# Altium PCB Chip Reader PCB.PcbDoc (part 1 of 2)
Units mm, origin at the board's own origin, x right, y up, seen from the top; angles counter-clockwise.
Board outline 155.1 x 69 mm, 2 copper layers (Top Layer, Bottom Layer), stack 1.6 mm thick; 129 components, 123 nets, 435 pads, 207 vias.
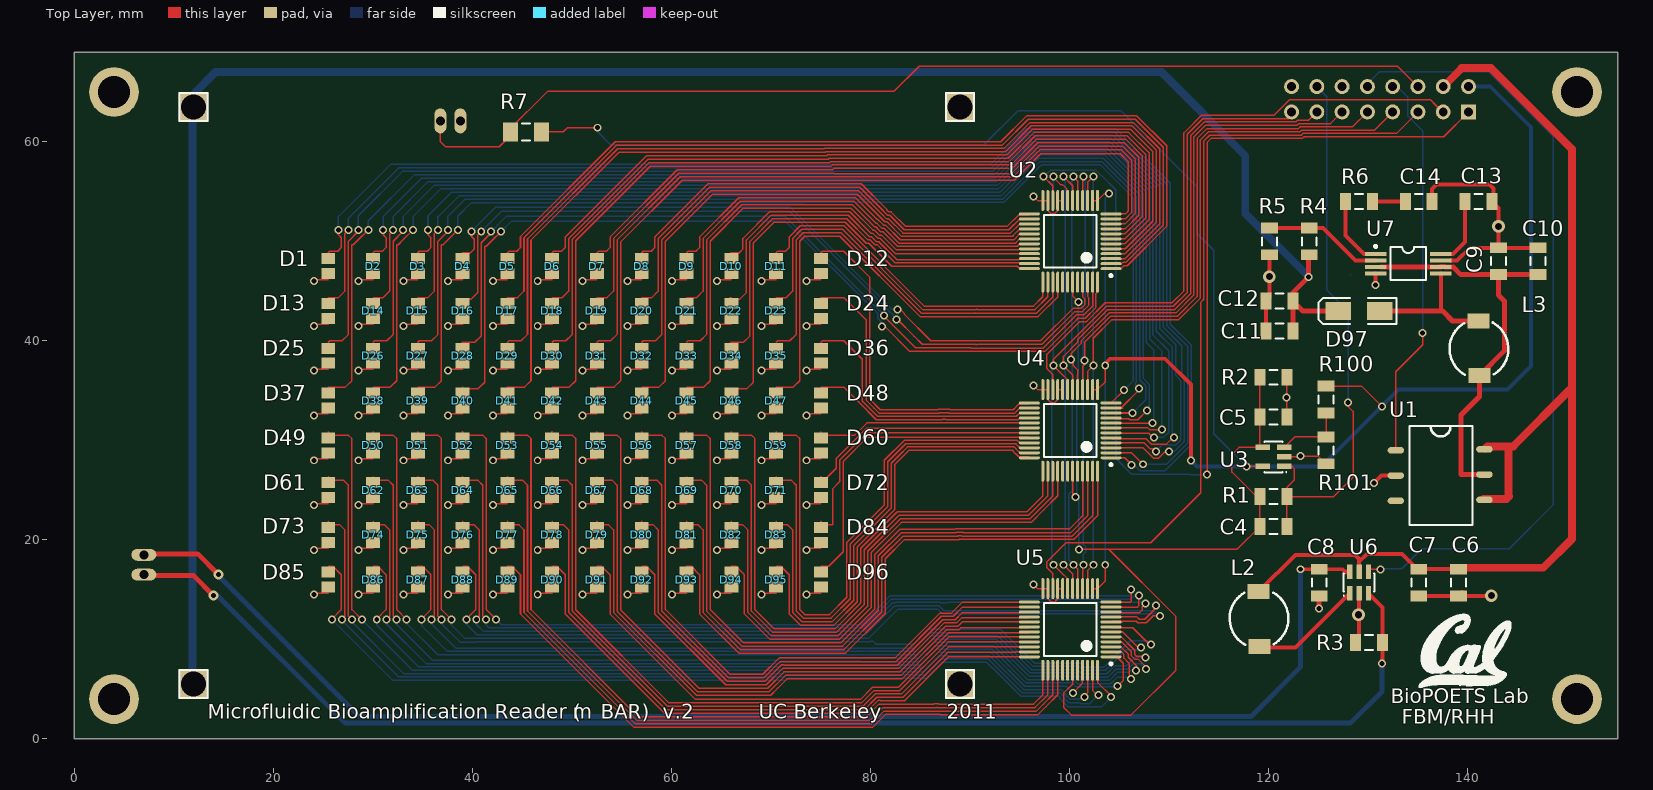
[diagram p0: Top Layer view]
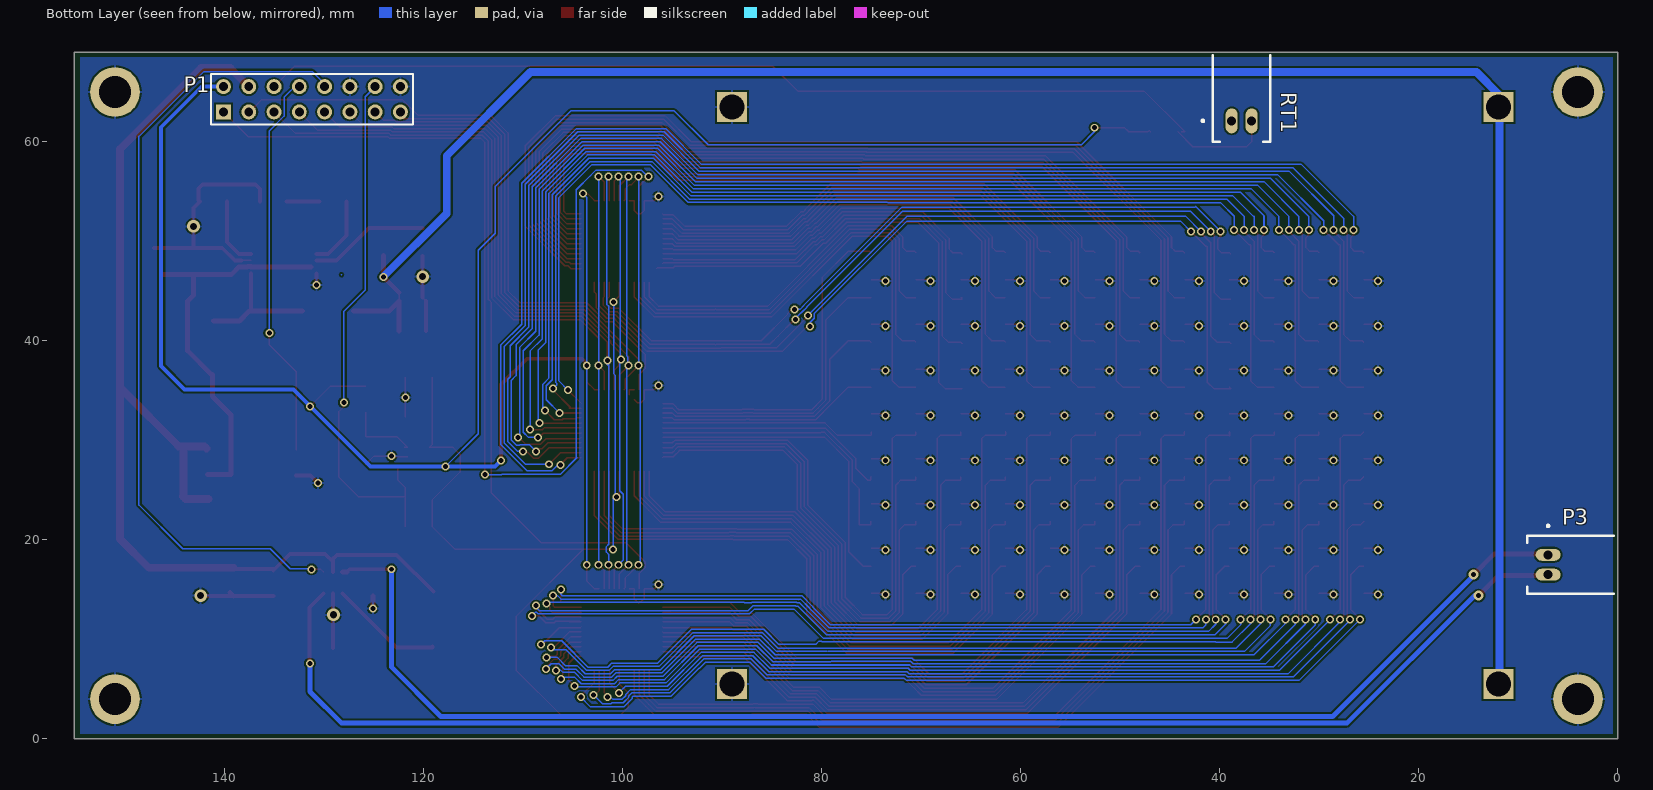
[diagram p1: Bottom Layer view, seen from below]

## Layer stack, top to bottom
Top Layer: signal copper 0.1
Dielectric: core 1.4, FR-4, Dk 4.8
Bottom Layer: signal copper 0.1

## Board outline
0,69 155.1,69 155.1,0 0,0

## Design rules (kind name [scope] priority, off if disabled: settings)
Clearance [All] p1: gap=0.18
FabricationTestpoint [(IsPad And (OnTopLayer Or OnBottomLayer))] p1: side=3 testpointundercomponent=TRUE minsize=1.016 maxsize=2.54 preferedsize=1.524 minholesize=0 maxholesize=1.016 preferedholesize=0.813 testpointgrid=0.025 allowsidetop=TRUE allowsidebottom=TRUE usegrid=TRUE gridtolerance=0
HoleSize [All] p1: absolutevalues=TRUE maxlimit=5 minlimit=0.025 maxpercent=80.000 minpercent=20.000
MinimumSolderMaskSliver [All] p1 off: minsoldermaskwidth=0.05
PolygonConnect [All] p1: connectstyle=Relief reliefconductorwidth=0.254 reliefentries=4 polygonreliefangle="90 Angle"
RoomDefinition "LED Driver" [InComponentClass('LED Driver')] p1 off: confinementstyle=ConfineIn formatcopy=TRUE lockcomponents=FALSE outline 114.744,5.7 143.09,5.7 143.09,17.94 114.744,17.94
RoomDefinition "Heater Driver" [InComponentClass('Heater Driver')] p2 off: confinementstyle=ConfineIn formatcopy=TRUE lockcomponents=FALSE outline 114.3,38.384 151.1,38.384 151.1,59 114.3,59
RoutingVias [All] p1: holewidth=0.5 width=0.8 viastyle="Through Hole" minholewidth=0.5 minwidth=0.8 maxholewidth=0.5 maxwidth=0.8
SilkscreenOverComponentPads [All] p1: minsilkscreentomaskgap=0.05
SolderMaskExpansion [All] p1: expansion=0.102
Width BATT+ [InNet('BATT+')] p1: maxlimit=0.9 minlimit=0.4 preferedwidth=0.5 minimp=50.000000 maximp=50.000000 favimp=50.000000
Width Default [All] p2: maxlimit=0.8 minlimit=0.152 preferedwidth=0.152 minimp=50.000000 maximp=50.000000 favimp=50.000000
24 further rules are at their usual default settings.

## Classes and differential pairs
component class "Heater Driver": C9 C10 C11 C12 C13 C14 D97 L3 R4 R5 R6 R7 RT1 U1 U7
component class "LED Driver": C6 C7 C8 L2 P3 R3 U6
component class Photodiodes: C4 C5 D1 D2 D3 D4 D5 D6 D7 D8 D9 D10 D11 D12 D13 D14 D15 D16 D17 D18 D19 D20 D21 D22 D23 D24 D25 D26 D27 D28 D29 D30 D31 D32 D33 D34 D35 D36 D37 D38 D39 D40 D41 D42 D43 D44 D45 D46 D47 D48 D49 D50 D51 D52 D53 D54 D55 D56 D57 D58 D59 D60 D61 D62 D63 D64 D65 D66 D67 D68 D69 D70 D71 D72 D73 D74 D75 D76 D77 D78 D79 D80 D81 D82 D83 D84 D85 D86 D87 D88 D89 D90 D91 D92 D93 D94 D95 D96 P1 R1 R2 R100 R101 U2 U3 U4 U5

## Components (designator, comment, footprint, x,y, rotation, side; value= is the part's Value field where it differs from the comment)
C4 "Cap Semi" CAPC3216L 120.49,21.34 r0 top
C5 "Cap Semi" CAPC3216L 120.49,32.34 r180 top
C6 "Cap" CAPC3216L 139.1,15.7 r90 top
C7 "Cap Semi" CAPC3216L 135.1,15.7 r90 top
C8 "Cap Semi" CAPC3216L 125.1,15.7 r90 top
C9 "Cap Semi" CAPC3216L 143.1,48 r270 top
C10 "Cap Semi" CAPC3216L 147.1,48 r270 top
C11 "Cap Semi" CAPC3216L 121.1,41 r0 top
C12 "Cap Semi" CAPC3216L 121.1,44 r0 top
C13 "Cap Semi" CAPC3216L 141.1,54 r180 top
C14 "Cap Semi" CAPC3216L 135.1,54 r180 top
D1 "Photo Sen" CAPC2012L 25.526,47.5 r90 top
D2 "Photo Sen" CAPC2012L 30.026,47.5 r90 top
D3 "Photo Sen" CAPC2012L 34.526,47.5 r90 top
D4 "Photo Sen" CAPC2012L 39.026,47.5 r90 top
D5 "Photo Sen" CAPC2012L 43.526,47.5 r90 top
D6 "Photo Sen" CAPC2012L 48.026,47.5 r90 top
D7 "Photo Sen" CAPC2012L 52.526,47.5 r90 top
D8 "Photo Sen" CAPC2012L 57.026,47.5 r90 top
D9 "Photo Sen" CAPC2012L 61.526,47.5 r90 top
D10 "Photo Sen" CAPC2012L 66.026,47.5 r90 top
D11 "Photo Sen" CAPC2012L 70.526,47.5 r90 top
D12 "Photo Sen" CAPC2012L 75.026,47.5 r90 top
D13 "Photo Sen" CAPC2012L 25.526,43 r90 top
D14 "Photo Sen" CAPC2012L 30.026,43 r90 top
D15 "Photo Sen" CAPC2012L 34.526,43 r90 top
D16 "Photo Sen" CAPC2012L 39.026,43 r90 top
D17 "Photo Sen" CAPC2012L 43.526,43 r90 top
D18 "Photo Sen" CAPC2012L 48.026,43 r90 top
D19 "Photo Sen" CAPC2012L 52.526,43 r90 top
D20 "Photo Sen" CAPC2012L 57.026,43 r90 top
D21 "Photo Sen" CAPC2012L 61.526,43 r90 top
D22 "Photo Sen" CAPC2012L 66.026,43 r90 top
D23 "Photo Sen" CAPC2012L 70.526,43 r90 top
D24 "Photo Sen" CAPC2012L 75.026,43 r90 top
D25 "Photo Sen" CAPC2012L 25.526,38.5 r90 top
D26 "Photo Sen" CAPC2012L 30.026,38.5 r90 top
D27 "Photo Sen" CAPC2012L 34.526,38.5 r90 top
D28 "Photo Sen" CAPC2012L 39.026,38.5 r90 top
D29 "Photo Sen" CAPC2012L 43.526,38.5 r90 top
D30 "Photo Sen" CAPC2012L 48.026,38.5 r90 top
D31 "Photo Sen" CAPC2012L 52.526,38.5 r90 top
D32 "Photo Sen" CAPC2012L 57.026,38.5 r90 top
D33 "Photo Sen" CAPC2012L 61.526,38.5 r90 top
D34 "Photo Sen" CAPC2012L 66.026,38.5 r90 top
D35 "Photo Sen" CAPC2012L 70.526,38.5 r90 top
D36 "Photo Sen" CAPC2012L 75.026,38.5 r90 top
D37 "Photo Sen" CAPC2012L 25.526,34 r90 top
D38 "Photo Sen" CAPC2012L 30.026,34 r90 top
D39 "Photo Sen" CAPC2012L 34.526,34 r90 top
D40 "Photo Sen" CAPC2012L 39.026,34 r90 top
D41 "Photo Sen" CAPC2012L 43.526,34 r90 top
D42 "Photo Sen" CAPC2012L 48.026,34 r90 top
D43 "Photo Sen" CAPC2012L 52.526,34 r90 top
D44 "Photo Sen" CAPC2012L 57.026,34 r90 top
D45 "Photo Sen" CAPC2012L 61.526,34 r90 top
D46 "Photo Sen" CAPC2012L 66.026,34 r90 top
D47 "Photo Sen" CAPC2012L 70.526,34 r90 top
D48 "Photo Sen" CAPC2012L 75.026,34 r90 top
D49 "Photo Sen" CAPC2012L 25.526,29.5 r90 top
D50 "Photo Sen" CAPC2012L 30.026,29.5 r90 top
D51 "Photo Sen" CAPC2012L 34.526,29.5 r90 top
D52 "Photo Sen" CAPC2012L 39.026,29.5 r90 top
D53 "Photo Sen" CAPC2012L 43.526,29.5 r90 top
D54 "Photo Sen" CAPC2012L 48.026,29.5 r90 top
D55 "Photo Sen" CAPC2012L 52.526,29.5 r90 top
D56 "Photo Sen" CAPC2012L 57.026,29.5 r90 top
D57 "Photo Sen" CAPC2012L 61.526,29.5 r90 top
D58 "Photo Sen" CAPC2012L 66.026,29.5 r90 top
D59 "Photo Sen" CAPC2012L 70.526,29.5 r90 top
D60 "Photo Sen" CAPC2012L 75.026,29.5 r90 top
D61 "Photo Sen" CAPC2012L 25.526,25 r90 top
D62 "Photo Sen" CAPC2012L 30.026,25 r90 top
D63 "Photo Sen" CAPC2012L 34.526,25 r90 top
D64 "Photo Sen" CAPC2012L 39.026,25 r90 top
D65 "Photo Sen" CAPC2012L 43.526,25 r90 top
D66 "Photo Sen" CAPC2012L 48.026,25 r90 top
D67 "Photo Sen" CAPC2012L 52.526,25 r90 top
D68 "Photo Sen" CAPC2012L 57.026,25 r90 top
D69 "Photo Sen" CAPC2012L 61.526,25 r90 top
D70 "Photo Sen" CAPC2012L 66.026,25 r90 top
D71 "Photo Sen" CAPC2012L 70.526,25 r90 top
D72 "Photo Sen" CAPC2012L 75.026,25 r90 top
D73 "Photo Sen" CAPC2012L 25.526,20.5 r90 top
D74 "Photo Sen" CAPC2012L 30.026,20.5 r90 top
D75 "Photo Sen" CAPC2012L 34.526,20.5 r90 top
D76 "Photo Sen" CAPC2012L 39.026,20.5 r90 top
D77 "Photo Sen" CAPC2012L 43.526,20.5 r90 top
D78 "Photo Sen" CAPC2012L 48.026,20.5 r90 top
D79 "Photo Sen" CAPC2012L 52.526,20.5 r90 top
D80 "Photo Sen" CAPC2012L 57.026,20.5 r90 top
D81 "Photo Sen" CAPC2012L 61.526,20.5 r90 top
D82 "Photo Sen" CAPC2012L 66.026,20.5 r90 top
D83 "Photo Sen" CAPC2012L 70.526,20.5 r90 top
D84 "Photo Sen" CAPC2012L 75.026,20.5 r90 top
D85 "Photo Sen" CAPC2012L 25.526,16 r90 top
D86 "Photo Sen" CAPC2012L 30.026,16 r90 top
D87 "Photo Sen" CAPC2012L 34.526,16 r90 top
D88 "Photo Sen" CAPC2012L 39.026,16 r90 top
D89 "Photo Sen" CAPC2012L 43.526,16 r90 top
D90 "Photo Sen" CAPC2012L 48.026,16 r90 top
D91 "Photo Sen" CAPC2012L 52.526,16 r90 top
D92 "Photo Sen" CAPC2012L 57.026,16 r90 top
D93 "Photo Sen" CAPC2012L 61.526,16 r90 top
D94 "Photo Sen" CAPC2012L 66.026,16 r90 top
D95 "Photo Sen" CAPC2012L 70.526,16 r90 top
D96 "Photo Sen" CAPC2012L 75.026,16 r90 top
D97 "CDBA120SL-G" DSO-C2/G1.6 129.1,43 r180 top
L2 "Inductor" "MURATA SMT INDUCTOR" 119.1,9.3 r0 top
L3 "Inductor" "MURATA SMT INDUCTOR" 141.1,42 r180 top
P1 "Header 8X2A" HDR2X8_CEN 140.1,63 r180 bottom
P3 "LED" "2MM JST PH - 2 PIN" 7,17.5 r180 bottom
R1 "Res3" RESC3216L 120.49,24.34 r180 top
R2 "Res3" RESC3216L 120.49,36.34 r180 top
R3 "Res3" RESC3216L 130.1,9.7 r0 top
R4 "Res3" RESC3216L 124.1,50 r270 top
R5 "Res3" RESC3216L 120.1,50 r90 top
R6 "Res3" RESC3216L 129.1,54 r180 top
R7 "Res3" RESC3216M 45.4,61 r0 top
R100 "Res3" RESC3216L 125.8,34.1 r90 top
R101 "Res3" RESC3216L 125.8,29 r90 top
RT1 "Res Thermal" "2MM JST PH - 2 PIN" 37.8,62.1 r90 bottom
U1 "CLA324 Relay" 6-SMD 132.8,29 r0 top
U2 "ADG732" ST-48_M 100.076,50 r180 top
U3 "AD8603" RJ-5 120.49,28.34 r90 top
U4 "ADG732" ST-48_M 100.076,31 r180 top
U5 "ADG732" ST-48_M 100.076,11 r180 top
U6 "MIC3289" SOT-23_A 129.1,15.7 r0 top
U7 "TPS61085" DB008 134.04,47.76 r270 top

## Footprints (in the part's own frame and the unit in brackets; to place one, negate y for a bottom-side part, rotate by r counter-clockwise, add the part's x,y. Pads: shape width x height; smd on the part's side, far side on the other; paste and mask are expansions set on the pad)
"2MM JST PH - 2 PIN" [mm]
  oval 2.5x1.2 hole 0.9: 1(0,1) 2(0,-1)
  silkscreen extent -2.1,-2.9 6.6,4
6-SMD [mm]
  oval 1.65x0.65 smd: 1(0,0) 2(0,-2.54) 3(0,-5.08) 4(8.9,-4.98) 5(8.9,-2.44) 6(8.9,0.1)
  silkscreen extent 1.36,-7.52 7.7,2.44
CAPC2012L [mm] "Chip Capacitor, Body 2.0x1.3mm, IPC High Density"
  rect 1.1x1.4 smd: 1(-0.75,0) 2(0.75,0)
  body extent -1.1,-0.72 1.1,0.72, height 1.1
CAPC3216L [mm] "Chip Capacitor, Body 3.2x1.6mm, IPC High Density"
  rect 1.1x1.7 smd: 1(-1.35,0) 2(1.35,0)
  silkscreen extent -0.4,-0.75 0.4,0.75, body extent -1.7,-0.9 1.7,0.9, height 1.3
DB008 [mm] "Plastic SSOP; 8 Leads; Body Width 5.3 mm; Pitch 0.65 mm"
  rect 0.4x2.15 smd: 1(-0.975,-3.275) 2(-0.325,-3.275) 3(0.325,-3.275) 4(0.975,-3.275) 5(0.975,3.275) 6(0.325,3.275) 7(-0.325,3.275) 8(-0.975,3.275)
  silkscreen extent -1.85,-3.4 1.65,1.8
DSO-C2/G1.6 [mm] "DO-214-AC/SMA; 2 C-Bend Leads; Body 5.3 x 2.6 mm, inc. leads (LxW)"
  rect 2.55x1.85 smd: 1(-2.075,0) 2(2.075,0)
  silkscreen extent -3.75,-1.33 4.05,1.33
HDR2X8_CEN [mm] "Connector; Header; 8x2 Position"
  rect 1.5x1.5 hole 0.9: 1(0,0)
  round 1.5 hole 0.9: 2(2.54,0) 3(5.08,0) 4(7.62,0) 5(10.16,0) 6(12.7,0) 7(15.24,0) 8(17.78,0) 9(0,2.54) 10(2.54,2.54) 11(5.08,2.54) 12(7.62,2.54) 13(10.16,2.54) 14(12.7,2.54) 15(15.24,2.54) 16(17.78,2.54)
  silkscreen extent -1.27,-1.27 19.05,3.81
"MURATA SMT INDUCTOR" [mm]
  rect 2.2x1.5 smd: 1(-0.1,5.5) 2(0,0)
  silkscreen extent -3,0.16 2.9,5.4
RESC3216L [mm] "Chip Resistor, Body 3.2x1.6mm, IPC High Density"
  rect 1.1x1.7 smd: 1(-1.35,0) 2(1.35,0)
  silkscreen extent -0.4,-0.75 0.4,0.75, body extent -1.68,-0.87 1.68,0.87, height 0.71
RESC3216M [mm] "Chip Resistor, Body 3.2x1.6mm, IPC Low Density"
  rect 1.5x1.9 smd: 1(-1.55,0) 2(1.55,0)
  silkscreen extent -0.4,-0.85 0.4,0.85, body extent -1.68,-0.87 1.68,0.87, height 0.71
RJ-5 [mm] "SOT-23/SC-74A; 5 Leads; Body 3.1 x 3 mm, inc. leads (LxW max)"
  rect 0.55x1.45 smd: 1(-0.95,-1.075) 2(0,-1.075) 3(0.95,-1.075) 4(0.95,1.075) 5(-0.95,1.075)
  silkscreen extent -1.57,-1.35 1.55,0.9
SOT-23_A [mm] "SOT-457/SC-74; 6 Leads; Body 3.1 x 3 mm, inc. leads (LxW max)"
  rect 0.55x1.45 smd: 1(-0.95,-1.075) 2(0,-1.075) 3(0.95,-1.075) 4(0.95,1.075) 5(0,1.075) 6(-0.95,1.075)
  silkscreen extent -1.57,-1.35 1.55,0.9
ST-48_M [mm] "48-Pin Thin Quad Flat Pack 0.5 mm Pitch, IPC Low Density"
  oval 2.1x0.3 smd: 1(-4.1,2.75) 2(-4.1,2.25) 3(-4.1,1.75) 4(-4.1,1.25) 5(-4.1,0.75) 6(-4.1,0.25) 7(-4.1,-0.25) 8(-4.1,-0.75) 9(-4.1,-1.25) 10(-4.1,-1.75) 11(-4.1,-2.25) 12(-4.1,-2.75) 25(4.1,-2.75) 26(4.1,-2.25) 27(4.1,-1.75) 28(4.1,-1.25) 29(4.1,-0.75) 30(4.1,-0.25) 31(4.1,0.25) 32(4.1,0.75) 33(4.1,1.25) 34(4.1,1.75) 35(4.1,2.25) 36(4.1,2.75)
  oval 0.3x2.1 smd: 13(-2.75,-4.1) 14(-2.25,-4.1) 15(-1.75,-4.1) 16(-1.25,-4.1) 17(-0.75,-4.1) 18(-0.25,-4.1) 19(0.25,-4.1) 20(0.75,-4.1) 21(1.25,-4.1) 22(1.75,-4.1) 23(2.25,-4.1) 24(2.75,-4.1) 37(2.75,4.1) 38(2.25,4.1) 39(1.75,4.1) 40(1.25,4.1) 41(0.75,4.1) 42(0.25,4.1) 43(-0.25,4.1) 44(-0.75,4.1) 45(-1.25,4.1) 46(-1.75,4.1) 47(-2.25,4.1) 48(-2.75,4.1)
  silkscreen extent -4.23,-2.65 2.65,3.57, body extent -3.5,-3.5 3.5,3.5, height 1.6

## Part data
C4 C5 C7 C8 C9 C10 C11 C12 C13 C14: "Capacitor (Semiconductor SIM Model)"
C6: "Capacitor"
D1 D2 D3 D4 D5 D6 D7 D8 D9 D10 D11 D12 D13 D14 D15 D16 D17 D18 D19 D20 D21 D22 D23 D24 D25 D26 D27 D28 D29 D30 D31 D32 D33 D34 D35 D36 D37 D38 D39 D40 D41 D42 D43 D44 D45 D46 D47 D48 D49 D50 D51 D52 D53 D54 D55 D56 D57 D58 D59 D60 D61 D62 D63 D64 D65 D66 D67 D68 D69 D70 D71 D72 D73 D74 D75 D76 D77 D78 D79 D80 D81 D82 D83 D84 D85 D86 D87 D88 D89 D90 D91 D92 D93 D94 D95 D96: "Photosensitive Diode"
D97: library part "Diode BAS70"
P1: "Header, 8-Pin, Dual row"
P3: library part "Header 2", "Header, 2-Pin"
R1 R2 R3 R4 R5 R6 R7 R100 R101: "Resistor"
RT1: "Thermistor"
U3: library part AD8051ART, "Low Cost, Single, High-Speed Rail-to-Rail Amplifier"

## Free pads (board coordinates)
  round 5 hole 3.2: 0(3.999,3.998) 0(3.999,64.998) 0(150.999,3.998) 0(150.999,64.998)
  rect 3x3 hole 2.5: 1(12,63.5) 1(12,5.5) 1(89,5.5) 1(89,63.5)

## Via types
v1: diameter 0.8, hole 0.5, Top Layer to Bottom Layer, 201 vias
v2: diameter 1.27, hole 0.711, Top Layer to Bottom Layer, 4 vias
v3: diameter 1, hole 0.5, Top Layer to Bottom Layer, 2 vias

## Nets (pads, with @x,y where several pads share a name; then routed paths per layer and width w, separated by ;. In a path a pad name is that pad's centre, name@x,y a point inside that pad or via, vN(x,y) a via of type N, cw(c..) or ccw(c..) an arc to the next point about the centre after c; other vN are vias at no path point)
+5V: P1.9 R7.2 R100.2 U2.13 U2.14 U3.5 U4.13 U4.14 U5.13 U5.14 | length 244
  Top Layer w0.152: R7.2@46.95,61 47.05,61.1 47.1,61.1 47.202,60.998 49.149,60.998 49.562,61.411 v1(52.57,61.411) ; U5.14@102.325,15.098 102.825,15.098 103.599,15.872 v1(103.599,17.498) ; U4.14@102.325,35.098 102.825,35.098 103.599,35.872 v1(103.599,37.498) v1@103.599,37.698 ; U2.14@102.325,54.098 102.825,54.098 103.525,54.798 v1(103.999,54.798) ; v1(117.787,27.376) 117.799,27.388 U3.5@119.414,27.388 ; R100.2@125.8,35.45 129.35,35.45 v1(131.4,33.4)
  Top Layer w0.4: v1@103.599,37.698 104.099,38.198 109.624,38.198 112.199,35.623 v1(112.199,27.997)
  Bottom Layer w0.152: v1@52.6,61.4 52.6,61 53.9,59.7 91.4,59.7 94.8,63.1 105.2,63.1 112.8,55.5 112.8,50.801 114.5,49.101 114.5,30.663 v1(117.787,27.376) ; v1(103.599,17.498) v1(103.599,37.498) 103.599,54.398 v1(103.999,54.798)
  Bottom Layer w0.4: v1(112.199,27.997) 112.82,27.376 v1(117.787,27.376) 125.345,27.376 133.069,35.1 144,35.1 146.361,37.461 146.361,61.46 142.283,65.538 P1.9@140.099,65.538
A0: P1.4 U2.15 U4.15 U5.15 | length 98.5
  Top Layer w0.152: U5.15@101.825,15.098 101.825,16.924 v1(102.399,17.498) ; U4.15@101.825,35.098 101.825,36.924 v1(102.399,37.498) 102.399,40.269 104.27,42.14 110.988,42.14 113.164,44.316 113.164,60.203 113.957,60.996 123.148,60.996 123.32,61.168 130.649,61.168 P1.4@132.479,62.998 ; U2.15@101.825,54.098 101.825,55.924 v1(102.399,56.498)
  Bottom Layer w0.152: v1(102.399,17.498) v1(102.399,37.498) v1(102.399,56.498)
A1: P1.5 U2.16 U4.16 U5.16 | length 97.9
  Top Layer w0.152: U5.16@101.325,15.098 101.325,17.424 v1(101.399,17.498) ; U4.16@101.325,35.098 101.325,37.424 101.519,37.618 ; U2.16@101.325,54.098 101.325,56.424 v1(101.399,56.498) ; 101.399,37.498 101.519,37.618 ; v1@101.399,38.198 101.399,38.045 101.519,37.925 101.519,37.618 ; P1.5@129.939,62.998 128.441,61.5 123.183,61.5 123.011,61.328 113.819,61.328 112.832,60.341 112.832,44.454 110.85,42.472 104.133,42.472 101.532,39.871 v1(101.532,38.045) 101.532,37.631 101.519,37.618
  Bottom Layer w0.152: v1(101.399,17.498) 101.399,18.542 101.627,18.77 101.627,19.33 101.399,19.558 101.399,37.498 ; v1(101.399,56.498) 101.575,56.322 101.575,43.642 101.399,43.466 101.399,37.96 v1@101.532,37.827 ; v1(101.532,38.045) v1@101.532,37.827 ; 101.399,37.498 101.399,37.694 v1@101.532,37.827 ; 101.399,37.498 101.532,37.631 v1@101.532,37.827
A2: P1.6 U2.17 U4.17 U5.17 | length 96.4
  Top Layer w0.152: v1(100.399,17.498) 100.825,17.072 U5.17@100.825,15.098 ; v1@100.399,38.198 v1@100.399,37.998 ; v1(100.399,56.498) 100.825,56.072 U2.17@100.825,54.098 ; U4.17@100.825,35.098 100.825,37.072 100.399,37.498 v1@100.399,37.998 ; P1.6@127.399,62.998 126.233,61.832 123.045,61.832 122.873,61.66 113.682,61.66 112.5,60.478 112.5,44.591 110.713,42.804 103.995,42.804 101.177,39.986 101.177,39.737 100.18,38.74 v1(100.18,38.131) 100.266,38.131 v1@100.399,37.998
  Bottom Layer w0.152: v1(100.18,38.131) 100.269,38.042 100.269,37.322 ; v1(100.399,17.498) 99.923,17.974 99.923,24.578 100.275,24.93 100.275,37.874 100.399,37.998 100.266,38.131 100.223,38.131 100.223,56.322 v1(100.399,56.498)
A3: P1.7 U2.18 U4.18 U5.18 | length 106.7
  Top Layer w0.152: v1(99.399,17.498) 100.325,16.572 U5.18@100.325,15.098 ; v1(99.399,56.498) 100.325,55.572 U2.18@100.325,54.098 ; U4.18@100.325,35.098 100.325,36.572 v1(99.399,37.498) 99.399,38.428 100.845,39.874 100.845,40.123 103.858,43.136 110.575,43.136 112.168,44.729 112.168,60.616 113.544,61.992 122.736,61.992 122.908,62.164 124.025,62.164 P1.7@124.859,62.998
  Bottom Layer w0.152: v1(99.399,17.498) 99.575,17.674 99.571,17.678 99.571,24.724 ; v1(99.399,56.498) 99.575,56.322 99.575,38.482 99.504,38.411 v1@99.504,37.851 ; v1@99.504,37.851 99.575,37.78 v1@99.575,37.498 ; v1@99.504,37.851 99.504,37.569 v1@99.575,37.498 ; 99.571,24.724 99.575,24.728 v1@99.575,37.498 ; 99.571,24.724 99.571,37.494 v1@99.575,37.498
A4: P1.8 U2.19 U4.19 U5.19 | length 93.2
  Top Layer w0.152: v1(98.399,17.498) 99.473,16.424 99.501,16.424 99.751,16.174 99.751,15.172 U5.19@99.825,15.099 ; v1(98.399,56.498) v1@98.502,56.498 ; v1@98.4,56.4 99.1,55.7 99.3,55.7 99.751,55.249 99.751,54.172 U2.19@99.825,54.098 ; U4.19@99.825,35.098 99.751,35.172 99.751,36.174 99.501,36.424 99.473,36.424 v1(98.399,37.498) 98.399,38.147 103.72,43.468 110.438,43.468 111.836,44.866 111.836,60.753 113.407,62.324 122.024,62.324 122.319,62.619 P1.8@122.319,62.998
  Bottom Layer w0.152: v1@98.223,37.674 v1(98.399,37.498) ; v1@98.223,56.322 v1(98.399,56.498) v1(98.399,37.498) ; v1(98.399,17.498) 98.223,17.674 98.223,37.322 v1(98.399,37.498)
BATT+: C6.2 C7.2 L2.1 P1.10 U1.4 U1.6 U6.5 | length 111.8
  Top Layer w0.4: L2.1@119,14.8 122.7,18.5 128.7,18.5 129.1,18.1 ; 129.099,18.136 129.1,18.135 129.1,18.1 ; U6.5@129.1,16.775 129.1,17.8 ; C6.2@139.05,17.05 C7.2@135.1,17.05 135.1,16.9 133.4,18.6 129.9,18.6 129.1,17.8 ; 129.1,17.8 129.1,18.1
  Top Layer w0.8: P1.10@137.559,65.538 139.419,67.398 142.362,67.398 150.5,59.26 150.5,20.1 147.6,17.2 C6.2@139.1,17.2 ; U1.4@141.6,24.1 143.9,24.1 144.15,24.35 144.1,24.4 144.1,29.4 ; U1.6@141.8,29.2 142,29.4 144.6,29.4 150.3,35.1
CS1: P1.1 U2.22 | length 108.9
  Top Layer w0.152: v1(97.399,56.498) 98.325,55.572 U2.22@98.325,54.098 ; v1(113.828,26.567) 113.828,59.928 114.232,60.332 123.423,60.332 123.595,60.504 137.605,60.504 P1.1@140.099,62.998
  Bottom Layer w0.152: v1(97.399,56.498) 97.471,56.498 98.127,57.154 102.671,57.154 103.217,56.607 103.236,56.607 104.655,55.189 104.655,28.298 104.599,28.242 106.271,26.57 112.127,26.57 112.13,26.567 v1(113.828,26.567)
CS2: P1.2 U4.22 | length 64
  Top Layer w0.152: U4.22@98.325,35.098 98.325,36.616 97.723,37.218 97.723,38.624 99.957,40.858 99.957,40.866 101.029,41.938 101.721,41.938 103.6,43.817 110.317,43.817 111.504,45.004 111.504,60.891 113.269,62.656 120.553,62.656 122.097,64.2 136.3,64.2 136.553,63.947 136.553,63.918 137.473,62.998 P1.2@137.559,62.998
CS3: P1.3 U5.22 | length 79.5
  Top Layer w0.152: U5.22@98.325,15.098 98.325,16.616 97.723,17.218 97.723,17.778 99.653,19.708 108.181,19.708 113.2,24.727 113.2,26.267 113.172,26.295 113.172,43.855 113.496,44.179 113.496,60.066 114.094,60.664 123.286,60.664 123.458,60.836 132.857,60.836 P1.3@135.019,62.998
GND: C5.1 C6.1 C7.1 C8.1 C9.1 C10.1 C11.1 C12.1 C13.1 C14.1 D1.1 D2.1 D3.1 D4.1 D5.1 D6.1 D7.1 D8.1 D9.1 D10.1 D11.1 D12.1 D13.1 D14.1 D15.1 D16.1 D17.1 D18.1 D19.1 D20.1 D21.1 D22.1 D23.1 D24.1 D25.1 D26.1 D27.1 D28.1 D29.1 D30.1 D31.1 D32.1 D33.1 D34.1 D35.1 D36.1 D37.1 D38.1 D39.1 D40.1 D41.1 D42.1 D43.1 D44.1 D45.1 D46.1 D47.1 D48.1 D49.1 D50.1 D51.1 D52.1 D53.1 D54.1 D55.1 D56.1 D57.1 D58.1 D59.1 D60.1 D61.1 D62.1 D63.1 D64.1 D65.1 D66.1 D67.1 D68.1 D69.1 D70.1 D71.1 D72.1 D73.1 D74.1 D75.1 D76.1 D77.1 D78.1 D79.1 D80.1 D81.1 D82.1 D83.1 D84.1 D85.1 D86.1 D87.1 D88.1 D89.1 D90.1 D91.1 D92.1 D93.1 D94.1 D95.1 D96.1 P1.14 P1.16 pad.0 pad.1@89,5.5 pad.1@89,63.5 R2.1 R3.1 R5.1 R101.1 U1.2 U2.20 U2.21 U2.23 U2.24 U3.2 U4.20 U4.21 U4.23 U4.24 U5.20 U5.21 U5.23 U5.24 U6.2 U7.4 U7.7 | length 220
  Top Layer w0.152: v1(24.075,14.498) 24.225,14.648 25.525,14.648 ; v1(24.075,18.998) 24.225,19.148 25.525,19.148 ; v1(24.075,23.498) 24.225,23.648 25.525,23.648 ; v1(24.075,27.998) 24.225,28.148 25.525,28.148 ; v1(24.075,32.498) 24.225,32.648 25.525,32.648 ; v1(24.075,36.998) 24.225,37.148 25.525,37.148 ; v1(24.075,41.498) 24.225,41.648 25.525,41.648 ; v1(24.075,45.998) 24.225,46.148 25.525,46.148 ; v1(28.575,14.498) 28.725,14.648 30.025,14.648 ; v1(28.575,18.998) 28.725,19.148 30.025,19.148 ; v1(28.575,23.498) 28.725,23.648 30.025,23.648 ; v1(28.575,27.998) 28.725,28.148 30.025,28.148 ; v1(28.575,32.498) 28.725,32.648 30.025,32.648 ; v1(28.575,36.998) 28.725,37.148 30.025,37.148 ; v1(28.575,41.498) 28.725,41.648 30.025,41.648 ; v1(28.575,45.998) 28.725,46.148 30.025,46.148 ; v1(33.075,14.498) 33.225,14.648 34.525,14.648 ; v1(33.075,18.998) 33.225,19.148 34.525,19.148 ; v1(33.075,23.498) 33.225,23.648 34.525,23.648 ; v1(33.075,27.998) 33.225,28.148 34.525,28.148 ; v1(33.075,32.498) 33.225,32.648 34.525,32.648 ; v1(33.075,36.998) 33.225,37.148 34.525,37.148 ; v1(33.075,41.498) 33.225,41.648 34.525,41.648 ; v1(33.075,45.998) 33.225,46.148 34.525,46.148 ; v1(37.575,14.498) 37.725,14.648 39.025,14.648 ; v1(37.575,18.998) 37.725,19.148 39.025,19.148 ; v1(37.575,23.498) 37.725,23.648 39.025,23.648 ; v1(37.575,27.998) 37.725,28.148 39.025,28.148 ; v1(37.575,32.498) 37.725,32.648 39.025,32.648 ; v1(37.575,36.998) 37.725,37.148 39.025,37.148 ; v1(37.575,41.498) 37.725,41.648 39.025,41.648 ; v1(37.575,45.998) 37.725,46.148 39.025,46.148 ; v1(42.075,14.498) 42.225,14.648 43.525,14.648 ; v1(42.075,18.998) 42.225,19.148 43.525,19.148 ; v1(42.075,23.498) 42.225,23.648 43.525,23.648 ; v1(42.075,27.998) 42.225,28.148 43.525,28.148 ; v1(42.075,32.498) 42.225,32.648 43.525,32.648 ; v1(42.075,36.998) 42.225,37.148 43.525,37.148 ; v1(42.075,41.498) 42.225,41.648 43.525,41.648 ; v1(42.075,45.998) 42.225,46.148 43.525,46.148 ; v1(46.575,14.498) 46.725,14.648 48.025,14.648 ; v1(46.575,18.998) 46.725,19.148 48.025,19.148 ; v1(46.575,23.498) 46.725,23.648 48.025,23.648 ; v1(46.575,27.998) 46.725,28.148 48.025,28.148 ; v1(46.575,32.498) 46.725,32.648 48.025,32.648 ; v1(46.575,36.998) 46.725,37.148 48.025,37.148 ; v1(46.575,41.498) 46.725,41.648 48.025,41.648 ; v1(46.575,45.998) 46.725,46.148 48.025,46.148 ; v1(51.075,14.498) 51.225,14.648 52.525,14.648 ; v1(51.075,18.998) 51.225,19.148 52.525,19.148 ; v1(51.075,23.498) 51.225,23.648 52.525,23.648 ; v1(51.075,27.998) 51.225,28.148 52.525,28.148 ; v1(51.075,32.498) 51.225,32.648 52.525,32.648 ; v1(51.075,36.998) 51.225,37.148 52.525,37.148 ; v1(51.075,41.498) 51.225,41.648 52.525,41.648 ; v1(51.075,45.998) 51.225,46.148 52.525,46.148 ; v1(55.575,14.498) 55.725,14.648 57.025,14.648 ; v1(55.575,18.998) 55.725,19.148 57.025,19.148 ; v1(55.575,23.498) 55.725,23.648 57.025,23.648 ; v1(55.575,27.998) 55.725,28.148 57.025,28.148 ; v1(55.575,32.498) 55.725,32.648 57.025,32.648 ; v1(55.575,36.998) 55.725,37.148 57.025,37.148 ; v1(55.575,41.498) 55.725,41.648 57.025,41.648 ; v1(55.575,45.998) 55.725,46.148 57.025,46.148 ; v1(60.075,14.498) 60.225,14.648 61.525,14.648 ; v1(60.075,18.998) 60.225,19.148 61.525,19.148 ; v1(60.075,23.498) 60.225,23.648 61.525,23.648 ; v1(60.075,27.998) 60.225,28.148 61.525,28.148 ; v1(60.075,32.498) 60.225,32.648 61.525,32.648 ; v1(60.075,36.998) 60.225,37.148 61.525,37.148 ; v1(60.075,41.498) 60.225,41.648 61.525,41.648 ; v1(60.075,45.998) 60.225,46.148 61.525,46.148 ; v1(64.575,14.498) 64.725,14.648 66.025,14.648 ; v1(64.575,18.998) 64.725,19.148 66.025,19.148 ; v1(64.575,23.498) 64.725,23.648 66.025,23.648 ; v1(64.575,27.998) 64.725,28.148 66.025,28.148 ; v1(64.575,32.498) 64.725,32.648 66.025,32.648 ; v1(64.575,36.998) 64.725,37.148 66.025,37.148 ; v1(64.575,41.498) 64.725,41.648 66.025,41.648 ; v1(64.575,45.998) 64.725,46.148 66.025,46.148 ; v1(69.075,14.498) 69.225,14.648 70.525,14.648 ; v1(69.075,18.998) 69.225,19.148 70.525,19.148 ; v1(69.075,23.498) 69.225,23.648 70.525,23.648 ; v1(69.075,27.998) 69.225,28.148 70.525,28.148 ; v1(69.075,32.498) 69.225,32.648 70.525,32.648 ; v1(69.075,36.998) 69.225,37.148 70.525,37.148 ; v1(69.075,41.498) 69.225,41.648 70.525,41.648 ; v1(69.075,45.998) 69.225,46.148 70.525,46.148 ; v1(73.575,14.498) 73.725,14.648 75.025,14.648 ; v1(73.575,18.998) 73.725,19.148 75.025,19.148 ; v1(73.575,23.498) 73.725,23.648 75.025,23.648 ; v1(73.575,27.998) 73.725,28.148 75.025,28.148 ; v1(73.575,32.498) 73.725,32.648 75.025,32.648 ; v1(73.575,36.998) 73.725,37.148 75.025,37.148 ; v1(73.575,41.498) 73.725,41.648 75.025,41.648 ; v1(73.575,45.998) 73.725,46.148 75.025,46.148 ; v1(96.399,15.498) 96.799,15.098 97.825,15.098 97.825,14.096 98.149,13.772 98.275,13.772 98.399,13.648 98.825,14.074 98.825,15.098 U5.20@99.325,15.098 ; v1(96.399,35.498) 96.799,35.098 97.825,35.098 97.825,34.096 98.149,33.772 98.501,33.772 U4.21@98.825,34.095 ; v1(96.399,54.498) 96.799,54.098 97.825,54.098 97.825,53.096 98.149,52.772 98.501,52.772 98.825,53.096 98.825,54.098 U2.20@99.325,54.098 ; U4.21@98.825,35.098 99.325,35.098 U4.20@99.325,34.596 ; C12.1@119.75,44 C12.1@120.099,44.348 ; U3.2@121.564,28.338 123.128,28.338 v1(123.215,28.425) 124.975,28.425 R101.1@125.8,27.6 ; v1(121.815,34.325) 121.8,34.31 v1@121.8,34.3 ; C5.1@121.84,32.34 121.84,34.26 v1@121.8,34.3 ; R2.1@121.84,36.34 121.84,34.34 v1@121.8,34.3 ; U7.7@137.314,48.083 U7.7@138.301,48.083 ; v2(142.4,14.4) 142.5,14.4 v2@142.45,14.35
  Top Layer w0.4: C11.1@119.75,41 C12.1@119.75,44 ; C12.1@120.099,44.348 R5.1@120.099,48.5 ; R3.1@129.099,9.121 U6.2@129.099,14.623 ; v1(130.6,25.7) 131.36,26.46 U1.2@132.8,26.46 ; v1(130.764,45.617) U7.4@130.764,46.783 ; C7.1@135.099,14.348 C6.1@139.099,14.348 ; C14.1@136.45,54 136.449,55.248 136.899,55.698 142.199,55.698 142.599,55.298 142.599,54.148 C13.1@142.45,54 143.099,53.348 143.099,51.497 C9.1@143.099,49.348 ; U7.7@138.301,48.083 138.961,48.083 140.226,49.348 C9.1@143.099,49.348 ; C6.1@139.1,14.35 v2@142.45,14.35 ; C10.1@147.099,49.348 C9.1@143.099,49.348
  Top Layer w0.5: v1(125.099,13.119) C8.1@125.099,14.348 ; C6.1@139.099,14.348 C6.1@139.1,14.35 C6.1@139.449,14.698
  Bottom Layer w0.152: v1(96.399,15.498) v1@96.417,15.516
  other v2: 129.049,12.474 120.087,46.449 143.109,51.497
NetC8_2: C8.2 P3.1 U6.6 | length 140
  Top Layer w0.4: v1(123.237,17.048) 127.426,17.048 127.701,16.773
  Top Layer w0.5: P3.1@7,18.6 12.4,18.6 v3(14.5,16.5) ; 127.701,16.773 U6.6@128.149,16.773
  Bottom Layer w0.5: v3(14.5,16.5) 14.5,16.4 28.641,2.259 118.259,2.259 123.237,7.237 v1(123.237,17.048)
NetC9_2: C9.2 C10.2 L3.1 U1.5 U7.3 U7.6 | length 39.7
  Top Layer w0.5: U7.3@131.29,47.435 U7.6@137.315,47.435 ; U7.6@137.3,47.453 137.7,47.453 137.738,47.415 138.568,47.415 139.333,46.65 C9.2@143.1,46.65 ; L3.1@141.2,36.6 141.2,34.4 139.34,32.54 139.34,26.56 U1.5@141.7,26.56 ; L3.1@141.3,36.6 143.7,39 143.7,44 143.1,44.6 C9.2@143.1,46.65 ; 146.139,46.65 C9.2@143.1,46.65
NetC11_2: C11.2 C12.2 D97.2 pad.1@12,5.5 pad.1@12,63.5 R4.2 | length 197.2
  Top Layer w0.152: C12.2@122.45,44 C12.2@122.449,44.835
  Top Layer w0.5: C11.2@122.45,41 C12.2@122.45,44 123.449,42.998 D97.2@127.024,42.998 ; C12.2@122.449,44.835 v1(124.041,46.427) R4.2@124.041,48.59
  Bottom Layer w0.8: pad.1@11.9,5.7 11.9,64.7 14.198,66.998 109.258,66.998 117.668,58.588 117.668,52.8 v1(124.041,46.427)
NetC13_2: C13.2 U7.8 | length 7
  Top Layer w0.4: U7.8@137.314,48.733 138.538,48.733 139.749,49.944 C13.2@139.75,54
NetC14_2: C14.2 R6.1 | length 3.3
  Top Layer w0.4: R6.1@130.45,54 C14.2@133.75,54
NetD1_2: D1.2 U4.1 | length 131.1
  Top Layer w0.152: 25.525,48.848 25.675,48.998 26.475,48.998 26.843,49.366 26.843,50.354 26.549,50.648 v1(26.549,51.148) ; U4.1@104.175,28.248 105.549,28.248 v1(106.255,27.542)
  Bottom Layer w0.152: v1(26.549,51.148) 26.549,52.498 26.563,52.498 31.787,57.722 92.057,57.722 95.667,61.332 104.633,61.332 110.123,55.842 110.123,41.674 112.231,39.566 112.231,29.581 109.572,26.922 107.119,26.922 106.499,27.542 v1(106.255,27.542)
NetD2_2: D2.2 U4.5 | length 120.1
  Top Layer w0.152: 30.025,48.848 30.175,48.998 30.975,48.998 31.343,49.366 31.343,50.354 31.049,50.648 v1(31.049,51.148) ; U4.5@104.175,30.248 104.225,30.248 104.299,30.174 107.667,30.174 108.219,29.622 109.767,29.622 v1@110.443,30.298
  Bottom Layer w0.152: v1(31.049,51.148) 31.049,52.498 34.865,56.314 92.527,56.314 96.217,60.003 104.083,60.003 108.724,55.363 108.724,40.953 110.347,39.33 110.347,30.35 v1@110.449,30.248
  other v1: 110.499,30.298
NetD3_2: D3.2 U4.9 | length 107.1
  Top Layer w0.152: 34.525,48.848 34.675,48.998 35.475,48.998 35.843,49.366 35.843,50.354 35.549,50.648 v1(35.549,51.148) ; U4.9@104.176,32.25 104.625,32.248 104.699,32.174 105.967,32.174 106.069,32.072 106.873,32.072 v1(107.799,32.998)
  Bottom Layer w0.152: v1(35.549,51.148) 35.549,52.578 37.877,54.906 92.997,54.906 96.767,58.675 103.533,58.675 107.396,54.813 107.396,36.255 108.027,35.624 108.027,33.226 v1(107.799,32.998)
NetD4_2: D4.2 U2.45 | length 75.9
  Top Layer w0.152: D4.2@38.875,48.698 39.025,48.848 39.825,48.848 40.193,49.216 40.193,50.204 39.899,50.498 v1(39.899,50.998) ; v1(82.719,43.158) 83.009,43.158 83.379,42.788 83.379,42.694 86.075,39.998 97.106,39.998 100.354,43.246 100.374,43.266 101.171,43.266 101.555,43.65 101.555,44.222 101.325,44.452 U2.45@101.325,45.898
  Bottom Layer w0.152: v1(39.899,50.998) 42.399,53.498 42.459,53.438 71.928,53.438 81.813,43.553 81.813,43.521 82.176,43.158 v1(82.719,43.158) v1@83.009,43.158
NetD5_2: D5.2 U2.1 | length 89.3
  Top Layer w0.152: 43.525,48.848 43.675,48.998 44.475,48.998 44.843,49.366 44.843,50.471 54.374,60.002 93.102,60.002 95.698,62.598 ; 95.7,62.6 95.732,62.632 96.038,62.632 96.072,62.598 106.698,62.598 106.7,62.6 106.773,62.6 109.771,59.602 109.771,51.841 109.762,51.832 109.762,51.497 105.818,47.553 105.483,47.553 105.178,47.248 U2.1@104.176,47.248
NetD6_2: D6.2 U2.5 | length 79.4
  Top Layer w0.152: 48.025,48.848 48.175,48.998 48.975,48.998 49.343,49.366 49.343,50.435 57.502,58.594 75.61,58.594 75.69,58.674 93.713,58.674 96.309,61.27 106.112,61.27 108.363,59.019 108.363,52.006 105.605,49.248 U2.5@104.176,49.25
NetD7_2: D7.2 U2.9 | length 69.4
  Top Layer w0.152: 52.525,48.848 52.675,48.998 53.475,48.998 53.843,49.366 53.843,50.435 60.594,57.186 76.194,57.186 76.354,57.346 94.263,57.346 96.82,59.903 105.488,59.903 106.955,58.435 106.955,52.628 105.575,51.248 U2.9@104.175,51.248
NetD8_2: D8.2 U2.25 | length 44.8
  Top Layer w0.152: 57.025,48.848 57.175,48.998 57.975,48.998 58.343,49.366 58.343,50.435 63.686,55.778 79.086,55.778 81.633,53.232 81.633,53.175 81.83,52.977 81.855,52.952 82.08,52.952 83.544,51.488 93.74,51.488 94.908,52.656 95.883,52.656 U2.25@95.975,52.748
NetD9_2: D9.2 U2.29 | length 39.4
  Top Layer w0.152: 61.525,48.848 61.675,48.998 62.475,48.998 62.843,49.366 62.843,50.435 66.778,54.37 78.503,54.37 80.637,52.236 80.693,52.236 81.305,51.624 81.53,51.624 82.994,50.16 94.442,50.16 94.67,50.388 94.67,50.418 95,50.748 U2.29@95.975,50.748
NetD10_2: D10.2 U2.33 | length 34.2
  Top Layer w0.152: D10.2@65.875,48.698 66.025,48.848 66.825,48.848 67.193,49.216 67.193,50.285 69.87,52.962 77.92,52.962 79.641,51.24 80.086,50.796 80.255,50.796 80.755,50.296 80.98,50.296 82.528,48.748 U2.33@95.975,48.748
NetD11_2: D11.2 U2.37 | length 33.7
  Top Layer w0.152: 70.525,48.848 70.675,48.998 71.475,48.998 71.843,49.366 71.843,50.435 72.962,51.554 77.336,51.554 85.392,43.498 96.399,43.498 97.325,44.424 U2.37@97.325,45.898
NetD12_2: D12.2 U4.25 | length 35.1
  Top Layer w0.152: 75.025,48.848 75.175,48.998 77.321,48.998 79.955,46.364 79.955,34.123 81.002,33.076 86.798,33.076 86.822,33.1 87.978,33.1 88.002,33.076 94.358,33.076 94.67,33.388 94.67,33.418 94.908,33.656 95.883,33.656 U4.25@95.975,33.748
NetD13_2: D13.2 U4.2 | length 133.3
  Top Layer w0.152: 25.525,44.348 26.545,44.348 27.195,44.998 27.195,50.794 v1(27.549,51.148) ; U4.2@104.175,28.748 106.249,28.748 v1(107.399,27.598)
  Bottom Layer w0.152: v1(27.549,51.148) 27.549,52.307 32.612,57.37 92.175,57.37 95.804,60.999 104.496,60.999 109.771,55.724 109.771,41.528 111.879,39.42 111.879,29.726 109.751,27.598 v1(107.399,27.598)
NetD14_2: D14.2 U4.6 | length 122
  Top Layer w0.152: 30.025,44.348 31.045,44.348 31.695,44.998 31.695,50.794 v1(32.049,51.148) ; U4.6@104.175,30.748 104.203,30.72 107.977,30.72 108.399,30.298 v1(108.499,30.298)
  Bottom Layer w0.152: v1(32.049,51.148) 32.049,52.498 35.513,55.962 92.645,55.962 96.354,59.671 103.946,59.671 108.392,55.225 108.392,40.581 109.975,38.998 109.975,30.818 109.455,30.298 v1(108.499,30.298)
NetD15_2: D15.2 U4.10 | length 108.9
  Top Layer w0.152: 34.525,44.348 35.545,44.348 36.195,44.998 36.195,50.794 v1(36.549,51.148) ; U4.10@104.176,32.75 v1(106.349,32.748)
  Bottom Layer w0.152: v1(36.549,51.148) 36.549,52.498 36.599,52.498 38.665,54.564 93.125,54.564 96.904,58.343 103.396,58.343 107.064,54.675 107.064,36.089 107.675,35.478 107.675,34.074 v1(106.349,32.748)
NetD16_2: D16.2 U2.46 | length 79.6
  Top Layer w0.152: D16.2@38.875,44.198 39.895,44.198 40.545,44.848 40.545,50.644 v1(40.899,50.998) ; v1@82.749,42.128 84.379,40.498 ; 84.379,40.478 85.211,39.646 90.554,39.646 90.6,39.6 90.665,39.6 90.711,39.646 97.251,39.646 100.499,42.894 100.539,42.934 101.308,42.934 101.927,43.553 101.927,44.348 101.825,44.45 U2.46@101.825,45.898
  Bottom Layer w0.152: v1(40.899,50.998) 42.899,52.998 71.898,52.998 81.481,43.416 81.481,43.384 82.039,42.826 82.067,42.826 82.639,42.254 v1(82.639,42.128)
NetD17_2: D17.2 U2.2 | length 92.4
  Top Layer w0.152: 43.525,44.348 44.545,44.348 45.195,44.998 45.195,50.144 45.195,50.353 54.492,59.65 75.173,59.65 75.193,59.67 93.27,59.67 95.866,62.266 ; 95.836,62.266 95.866,62.266 ; U2.2@104.176,47.748 105.209,47.748 105.377,47.916 105.437,47.916 105.469,47.885 105.681,47.885 109.43,51.634 109.43,51.846 109.399,51.878 109.399,51.938 109.419,51.958 109.419,59.456 106.609,62.266 95.866,62.266
NetD18_2: D18.2 U2.6 | length 82.3
  Top Layer w0.152: 48.025,44.348 49.045,44.348 49.695,44.998 49.695,50.144 49.695,50.293 57.644,58.242 75.756,58.242 75.856,58.342 93.851,58.342 96.447,60.938 105.946,60.938 108.011,58.873 108.011,52.184 105.575,49.748 U2.6@104.175,49.748